# Altium PCB DIOT_Template.PcbDoc (part 4 of 4)
Units mm, origin at the board's own origin, x right, y up, seen from the top; angles counter-clockwise.
Board outline 222.9 x 100 mm, 4 copper layers (L1, P2, P3, L4), stack 1.546 mm thick; 233 components, 184 nets, 1067 pads, 325 vias.
Unrouted connection lines stored in the file: 423.
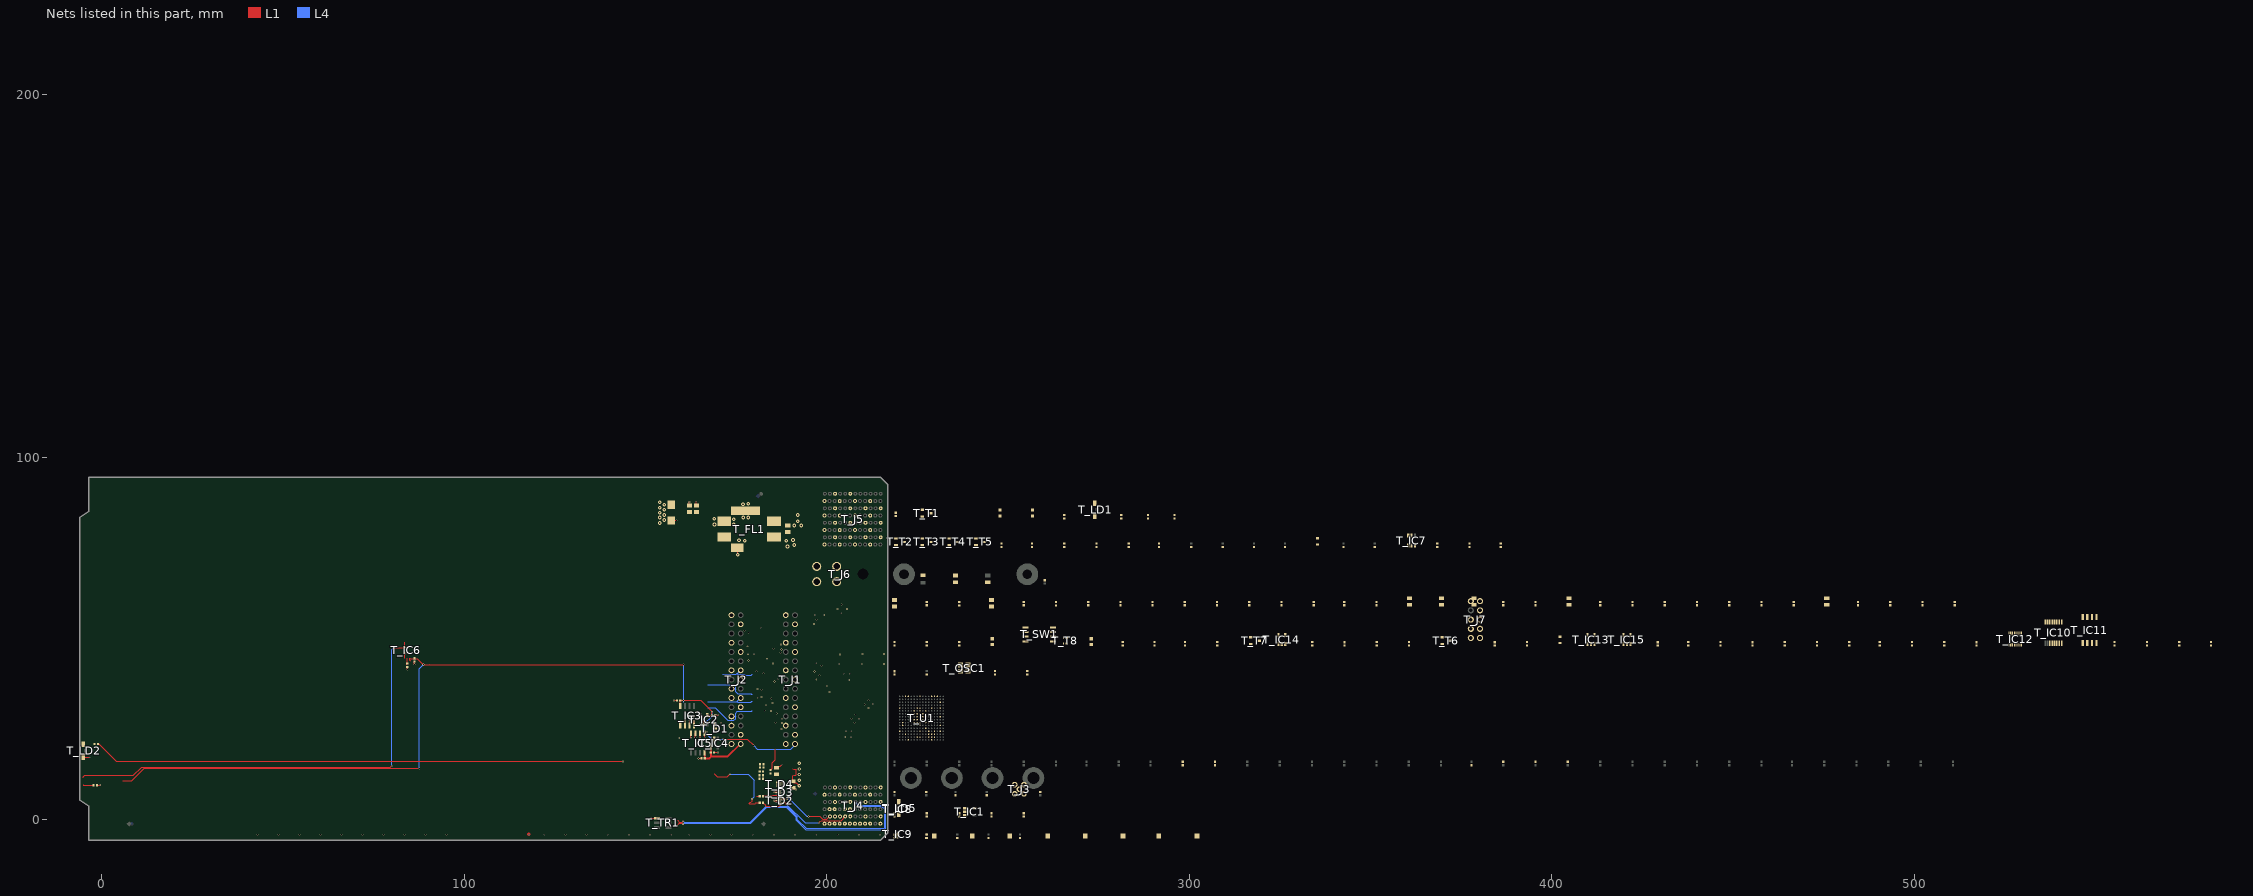
[diagram p5: the nets of this part, all layers, seen from the top]

## Via types
v1: diameter 0.5, hole 0.25, L1 to L4, tented both sides, 289 vias
v2: diameter 1, hole 0.45, L1 to L4, tented both sides, 28 vias
v3: diameter 0.9, hole 0.45, L1 to L4, tented both sides, 5 vias
v4: diameter 0.6, hole 0.3, L1 to L4, tented both sides, 3 vias

## Nets (pads, with @x,y where several pads share a name; then routed paths per layer and width w, separated by ;. In a path a pad name is that pad's centre, name@x,y a point inside that pad or via, vN(x,y) a via of type N, cw(c..) or ccw(c..) an arc to the next point about the centre after c; other vN are vias at no path point) (continued)
EEM_IO.LVDS_P12: T_J2.14 T_R47.2 | length 10.3
  L4 w0.14: 171.311,40.147 174.723,40.147 174.725,40.149 174.936,40.149 175.052,40.149 175.237,40.268 175.357,40.38 175.682,40.686 T_J2.14@175.704,40.707 ; T_J2.14@176.27,41.239 T_J2.14@175.704,40.707 ; 179.438,40.132 179.438,40.112 179.151,39.825 177.607,39.825 177.283,40.149 175.47,40.149 175.388,40.231 175.388,40.347 175.704,40.663 T_J2.14@175.704,40.707
EEM_IO.LVDS_P13: T_J2.17 T_R48.2 | length 15.3
  L4 w0.14: 167.2,37.248 174.576,37.248 174.85,36.974 174.85,36.276 174.715,36.14 174.866,35.989 174.866,35.334 175.442,34.758 179.147,34.758 179.234,34.671 179.438,34.671 ; T_J2.17@173.73,36.16 174.667,36.16
EEM_IO.LVDS_P14: T_J2.20 T_R49.2 | length 13.9
  L4 w0.14: 167.2,32.55 175.2,32.55 175.331,32.681 ; T_J2.20@176.27,33.62 175.331,32.681 ; 179.464,32.664 179.3,32.664 179.21,32.574 179.21,32.561 179.128,32.479 175.413,32.479 175.331,32.561 175.331,32.681
EEM_IO.LVDS_P15: T_J2.23 T_R50.1 | length 16.8
  L4 w0.14: 167.2,30.9 169.237,30.9 172.7,27.437 174.406,27.437 174.85,27.881 174.85,28.458 174.768,28.54 ; T_J2.23@173.73,28.54 174.768,28.54 ; 179.477,30.074 179.346,30.074 179.297,30.025 179.297,29.982 179.215,29.9 175.392,29.9 174.85,29.358 174.85,28.622 174.768,28.54
FLASH_SCK: T_IC11.6 T_IC12.9 T_J7.4 T_R76.1
FLASH_SDI: T_IC11.5 T_IC12.4 T_J7.2
FLASH_SDO: T_IC11.2 T_IC12.7 T_J7.3
FLASH_SS: T_IC12.12 T_IC15.2 T_J7.1 T_R77.1 T_R79.1
FLASH_SS_R: T_IC11.1 T_IC15.4 T_R79.2 T_R101.2
FPGA_CFG.FPGA_CDONE: T_J7.10 T_LD5.1 T_R70.1 T_TP9.1 T_U1.M10
FPGA_CFG.FPGA_CRESET_N: T_D7.2 T_IC14.4 T_R71.1 T_U1.N11
FPGA_CFG.FPGA_CSBSEL0: T_R90.1 T_SW1.8 T_U1.K11
FPGA_CFG.FPGA_CSBSEL1: T_R91.1 T_SW1.7 T_U1.P13
FPGA_CFG.FPGA_SCK: T_IC12.10 T_U1.R11
FPGA_CFG.FPGA_SDI: T_IC12.6 T_U1.P11
FPGA_CFG.FPGA_SDO: T_IC12.3 T_U1.P12
FPGA_CFG.FPGA_SS: T_IC12.13 T_U1.R12
GA0: T_R13.1 T_R31.1 T_T2.1
GA1: T_R14.1 T_R32.1 T_T3.1
GA2: T_R16.1 T_R33.1 T_T4.1
GA3: T_R18.1 T_R34.1 T_T5.1
GND: T_C1.1 T_C2.1 T_C3.1 T_C4.1 T_C5.1 T_C6.1 T_C8.1 T_C9.1 T_C10.1 T_C12.2 T_C13.2 T_C16.1 T_C20.1 T_C22.1 T_C23.1 T_C24.1 T_C25.1 T_C26.1 T_C27.1 T_C28.1 T_C29.1 T_C30.1 T_C31.1 T_C32.1 T_C33.1 T_C34.1 T_C35.1 T_C36.1 T_C37.1 T_C38.1 T_C39.1 T_C40.1 T_C41.1 T_C42.1 T_C43.1 T_C44.1 T_C45.1 T_C46.1 T_C47.1 T_C48.1 T_C49.1 T_C50.1 T_C51.1 T_C52.1 T_C53.1 T_C54.1 T_C59.1 T_C60.1 T_C61.1 T_C62.1 T_C63.1 T_C64.1 T_D1.2 T_D1.7 T_D2.2 T_D2.7 T_D3.2 T_D3.7 T_D4.2 T_D4.7 T_D5.2 T_FL1.4 T_IC1.2 T_IC2.2 T_IC3.1 T_IC3.2 T_IC3.3 T_IC3.4 T_IC4.2 T_IC5.1 T_IC5.2 T_IC5.3 T_IC5.4 T_IC6.2 T_IC7.2 T_IC8.4 T_IC9.4 T_IC10.13 T_IC11.4 T_IC12.8 T_IC13.3 T_IC14.3 T_IC15.3 T_J1.1 T_J1.4 T_J1.7 T_J1.10 T_J1.13 T_J1.16 T_J1.19 T_J1.22 T_J1.25 T_J2.1 T_J2.4 T_J2.7 T_J2.10 T_J2.13 T_J2.16 T_J2.19 T_J2.22 T_J2.25 T_J3.2 T_J4.A2 T_J4.A4 T_J4.A6 T_J4.C1 T_J4.C5 T_J4.D2 T_J4.D4 T_J4.D6 T_J4.F1 T_J4.F5 T_J4.G2 T_J4.G4 T_J4.G6 T_J4.I1 T_J4.I5 T_J4.J2 T_J4.J4 T_J4.J6 T_J4.L1 T_J4.L5 T_J5.A2 T_J5.A4 T_J5.A6 T_J5.C1 T_J5.C3 T_J5.C5 T_J5.C7 T_J5.D2 T_J5.D4 T_J5.D6 T_J5.F1 T_J5.F3 T_J5.F5 T_J5.F7 T_J5.G2 T_J5.G4 T_J5.G6 T_J5.G8 T_J5.I1 T_J5.I3 T_J5.I5 T_J5.I7 T_J5.J2 T_J5.J4 T_J5.J6 T_J5.J8 T_J5.L1 T_J5.L3 T_J5.L5 T_J5.L7 T_J7.5 T_LD3.1 T_LD4.1 T_OSC1.2 T_R7.1 T_R19.1 T_R25.1 T_R26.2 T_R27.2 T_R30.1 T_R69.1 T_R81.2 T_R83.2 T_R86.2 T_R94.1 T_R95.1 T_R99.1 T_SW1.1 T_SW1.2 T_SW1.3 T_SW1.4 T_T1.2 T_T2.2 T_T3.2 T_T4.2 T_T5.2 T_T6.2 T_TP5.1 T_TP6.1 T_TP7.1 T_TR1.6 T_U1.A4 T_U1.A12 T_U1.E15 T_U1.G7 T_U1.G8 T_U1.G9 T_U1.H7 T_U1.H8 T_U1.H9 T_U1.J7 T_U1.J8 T_U1.J9 T_U1.K2 T_U1.K7 T_U1.L15 T_U1.R7 T_U1.T4 T_U1.T12 | length 32.9
  L1 w0.25: v1(151.6,0.5) 151.63,0.47 T_TR1.6@153.21,0.47 ; v1(157.9,32.9) 157.937,32.937 T_C4.1@158.713,32.937 ; v1(159.6,27.3) 159.623,27.277 T_IC3.1@159.623,26.017 ; T_IC3.2@160.893,26.017 160.893,27.293 v1(160.9,27.3) ; T_IC3.3@162.163,26.017 162.163,27.322 v1(162.164,27.323) ; v1@162.529,22.637 T_IC5.4@162.529,23.875 ; v1(163.4,27.3) 163.433,27.267 T_IC3.4@163.433,26.017 ; v1(163.795,22.641) 163.799,22.645 T_IC5.3@163.799,23.875 ; v1(164.6,16.952) 164.616,16.968 T_C6.1@165.45,16.968 ; T_IC5.2@165.069,23.875 165.069,22.667 v1(165.089,22.647) ; T_IC2.2@166.1,26.3 v1(166.1,27.4) ; T_IC5.1@166.339,23.875 166.339,22.676 v1(166.367,22.649) ; T_C5.1@168.95,18.6 v1(170,18.6) ; v1(169,21.5) T_IC4.2@169,22.5 ; T_D1.7@169.1,25.2 T_D1.2@169.1,25.96 v1(169.1,26.9) ; T_C3.1@169.25,28.9 v1(170.1,28.9)
  L1 w0.3: 83.67,44.587 83.681,44.599 83.681,45.835 v1(83.693,45.847) ; v1(84.3,41.5) 84.313,41.513 84.313,42.168 T_R25.1@84.326,42.181 ; T_C8.1@86.28,43.67 T_C8.1@86.3,43.65 v1(86.3,42.9) ; T_D5.2@157.15,82.582 157.192,82.623 v1(158.623,82.623) ; v1(162.128,87.678) 162.128,86.794 T_C9.1@162.171,86.751 ; v1(164.008,87.729) 164.008,86.864 T_C10.1@164.121,86.751 ; T_FL1.4@175.338,75.06 175.489,74.909 v2(175.489,73.175) ; v1(185.49,5.324) 185.498,5.331 T_D2.2@186.24,5.331 T_D2.7@187,5.331 ; v1(185.595,7.663) 185.632,7.7 T_D3.2@186.5,7.7 ; 186.1,14.8 187.2,14.8 v1(187.6,15.2) ; T_D3.2@186.501,7.701 T_D3.7@186.937,7.701 ; T_C1.1@190.655,8.965 190.98,8.64 191.224,8.64 191.464,8.4 v1(191.5,8.4)
  other v1: 159.309,22.573 162.53,22.636 206.7,22.8 205.1,22.9 167,24.3 205.305,24.433 206.752,24.433 187.5,25.1 187.7,26.7 170.889,26.789 185.9,26.8 207.7,26.8 187.656,27.901 206.8,27.9 208.9,27.9 207.9,29 186.2,29.3 184.6,30 182.9,30.1 211.5,30.9 183.3,31.6 210.5,31.8 212.7,32 185.039,32.207 211.5,33 184.7,33.5 181,33.7 182,33.9 200.8,35.3 182,35.9 180.9,36.1 200,36.9 185.6,38.2 206.2,38.6 197.1,38.7 186.5,38.8 187.139,39.7 198,39.9 204.7,40.3 206.375,40.31 182.602,40.435 196.6,40.9 180.6,41 198.6,42.5 215.831,42.965 203.461,42.99 209.653,42.978 185.2,43.1 197.1,43.2 178.4,44 183.513,44.418 203.659,45.62 178.3,45.7 179.959,45.695 215.831,45.759 209.882,45.772 187.3,46.1 187.563,47.009 185.3,47.2 178.144,47.908 187.4,48.4 178.507,51.637 177.292,52.172 181.8,53 196.5,54 197.2,55.2 196.7,56.5 199.3,56.5 204,57 202.997,58.166 205.6,58.2 204.14,59.436
  other v2: 177.4,77 175.8,77.1 169.063,81.455 174.397,81.48 174.346,82.954 168.986,83.03 178.384,83.385 176.962,83.411 176.911,87.094 178.334,87.145
GNDPLL0: T_C55.1 T_C56.1 T_U1.N8
GNDPLL1: T_C57.1 T_C58.1 T_U1.E7
INT_I2C.SCL: T_IC9.3 T_R68.1
INT_I2C.SDA: T_IC9.2 T_R67.1
MUX_nEN: T_IC12.15 T_IC13.4 T_R78.1 T_R85.2
NetT_C2_2: T_C2.2 T_IC1.5 T_R2.1
NetT_C7_2: T_C7.2 T_J3.1
NetT_C11_1: T_C11.1 T_FL1.3 T_J6.1 T_J6.2
  other v2: 191.1,81.2 193,81.2 192,82.4 192,84.1
NetT_C11_2: T_C11.2 T_FL1.1 T_J6.3 T_J6.4
  other v2: 189.2,75.4 191.1,75.8 188.8,77 190.7,77.2
NetT_C13_1: T_C13.1 T_IC7.5 T_R29.2 T_R30.2
NetT_C14_1: T_C14.1 T_C21.2
NetT_C15_1: T_C15.1 T_T5.3
NetT_C17_1: T_C17.1 T_T2.3
NetT_C18_1: T_C18.1 T_C19.1 T_T3.3
NetT_C21_1: T_C21.1 T_T4.3
NetT_D2_4: T_D2.4 T_J4.H2 T_R15.2 | length 26.6
  L1 w0.125: T_R15.2@182.47,4.7 182.47,4.68 182.697,4.453 182.717,4.453 183.37,3.8 186.859,3.8 187.626,4.567 187.626,4.744 187.713,4.831 T_D2.4@187.76,4.831 188.469,4.831 188.861,4.439 v1(188.861,4.367) ; v1(197.858,-0.795) 197.896,-0.795 198.253,-0.438 198.253,-0.435 198.488,-0.2 203.95,-0.2 T_J4.H2@205.1,0.95
  L4 w0.125: v1(188.861,4.367) 194.023,-0.795 v1(197.858,-0.795)
NetT_D2_6: T_D2.6 T_J4.K2 T_R17.2 | length 21.7
  L1 w0.125: T_R17.2@182.47,6.535 182.531,6.596 185.032,6.596 185.188,6.752 186.107,6.752 186.539,6.32 187.209,6.32 187.507,6.021 187.507,5.919 187.595,5.831 T_D2.6@187.76,5.831 187.791,5.8 v1(189.1,5.8) ; v1(194.958,0.963) 198.037,0.963 198.87,0.13 200.081,0.13 T_J4.K2@200.9,0.95
  L4 w0.125: v1(189.1,5.8) 189.723,5.8 194.489,1.034 194.886,1.034 v1(194.958,0.963)
NetT_D6_2: T_D6.2 T_IC7.3
NetT_IC1_3: T_IC1.3 T_R4.2 T_R7.2
NetT_IC6_4: T_IC6.4 T_R25.2 | length 1.7
  L1 w0.125: T_R25.2@84.049,42.939 84.144,42.939 T_R25.2@84.326,43.121 ; T_R25.2@84.326,43.19 84.326,44.581
NetT_IC15_1: T_IC15.1 T_R98.2 T_R99.2
NetT_LD1_2: T_LD1.2 T_R1.1
NetT_LD2_1: T_LD2.1 T_T1.3 | length 1.8
  L1 w0.3: T_LD2.1@-5.1,17.3 v1(-3.251,17.3)
NetT_LD2_2: T_LD2.2 T_R3.2 | length 146.5
  L1 w0.3: -0.686,20.955 -0.686,20.905 -0.386,20.605 4.09,16.129 v1(143.815,16.129)
NetT_LD3_2: T_LD3.2 T_R5.1 | length 2.9
  L1 w0.125: -5.1,9.649 -5.001,9.55 T_R5.1@-2.223,9.55
NetT_LD4_2: T_LD4.2 T_R6.1
NetT_LD5_2: T_LD5.2 T_R100.1
NetT_OSC1_3: T_OSC1.3 T_R72.1
NetT_R85_1: T_R85.1 T_T6.3
NetT_R86_1: T_R86.1 T_R87.1 T_T6.1
NetT_R89_1: T_R89.1 T_T8.2
NetT_R89_2: T_R89.2 T_R95.2 T_T8.3 T_T8.5
NetT_R94_2: T_R94.2 T_T7.1 T_T8.6
P1V2: T_C32.2 T_C33.2 T_C34.2 T_C35.2 T_C36.2 T_C37.2 T_R73.1 T_R74.2 T_U1.A14 T_U1.F6 T_U1.F10 T_U1.K6 T_U1.K10 T_U1.L2
P2V5: T_C39.2 T_U1.E12
P3V3: T_C25.2 T_C26.2 T_C27.2 T_C28.2 T_C29.2 T_C30.2 T_C31.2 T_C38.2 T_IC9.1 T_IC9.5 T_OSC1.1 T_OSC1.4 T_R5.2 T_R67.2 T_R68.2 T_R69.2 T_R70.2 T_R71.2 T_R90.2 T_R91.2 T_R92.2 T_R93.2 T_R100.2 T_TP2.1 T_U1.K8 T_U1.N13 T_U1.P3 T_U1.R8 T_U1.R13 | length 0.9
  L1 w0.3: T_R5.2@-1.283,9.55 -1.257,9.576 -0.406,9.576 v1(-0.381,9.601)
P3V3_MP: T_C3.2 T_C4.2 T_C8.2 T_C20.2 T_C22.2 T_C23.2 T_C24.2 T_C61.2 T_C62.2 T_C63.2 T_IC2.4 T_IC3.8 T_IC6.5 T_IC7.6 T_IC8.1 T_IC8.8 T_IC9.8 T_IC10.12 T_IC10.15 T_IC13.5 T_IC14.5 T_J1.30 T_R1.2 T_R2.2 T_R6.2 T_R8.2 T_R31.2 T_R32.2 T_R33.2 T_R34.2 T_R75.2 T_R80.2 T_R82.2 T_R84.1 T_R87.2 T_T7.3 T_T8.4 T_TP3.1 | length 254.3
  L1 w0.2: 5.829,10.77 8.293,10.77 11.722,14.199 v1(87.63,14.199) ; 85.095,43.937 84.97,44.062 84.97,44.587 85.081,44.475 T_C8.2@86.3,44.475 ; T_C8.2@86.3,44.55 86.35,44.5 87.1,44.5 v1(88.776,42.824) 90.3,42.824 ; 90.3,42.9 90.376,42.824 v1(160.579,42.824) ; T_IC3.8@159.623,31.417 159.623,32.928 T_C4.2@159.613,32.937 165.263,32.937 v1(168.4,29.8) 168.35,29.75 T_C3.2@168.35,28.9 T_IC2.4@167.05,28.9 ; v1(171.5,22.3) 178.09,22.3 v1(179.867,20.523) ; 185.811,17.159 v1@185.811,19.489
  L1 w0.3: T_R2.2@184.5,13.77 184.52,13.77 184.66,13.91 184.66,13.93 184.96,14.23 184.96,15.76 185.811,16.611 185.811,17.159
  L4 w0.2: v1(87.63,14.199) 87.618,14.211 87.618,41.666 v1(88.776,42.824) ; v1(160.5,32.9) v1@160.554,32.954 ; 160.554,32.454 160.554,42.799 v1(160.579,42.824) ; v1(168.4,29.8) 168.4,28.64 166.4,26.64 166.4,24.1 167.7,22.8 168.2,22.3 170.9,22.3 v1(171.5,22.3) ; v1(179.867,20.523) 179.877,20.523 180.9,19.5 v1(185.8,19.5) 185.817,19.517 190.096,19.517 191.27,20.691 T_J1.30@191.27,20.92 T_J1.30@191.482,20.708
P3V3_MP2: T_C5.2 T_C6.2 T_IC4.4 T_IC5.8 T_J2.30 | length 15.1
  L1 w0.5: T_IC5.8@166.339,18.475 166.35,18.464 T_C6.2@166.35,16.968 167.661,16.968 168.093,17.4 168.05,17.443 T_IC4.4@168.05,19.9 ; 168.342,17.5 172.688,17.5 175.975,20.787 T_J2.30@175.975,20.949
P3V3_PROG: T_C59.2 T_C60.2 T_C64.2 T_IC11.3 T_IC11.7 T_IC11.8 T_IC12.16 T_IC15.5 T_J7.6 T_R76.2 T_R77.2 T_R78.2 T_R88.2 T_R101.1 T_T7.2 T_T8.1
P12V0: T_C1.2 T_C9.2 T_C10.2 T_D5.1 T_FL1.2 T_IC1.1 T_J1.28 T_J1.29 T_J2.28 T_J2.29 T_J4.A1 T_J4.D1 T_J4.E1 T_J4.G1 T_J4.H1 T_J4.J1 T_J4.K1 T_R3.1 T_R4.1 T_R29.1 T_TP1.1 | length 7.3
  L1 w0.3: 190.704,14.078 190.846,13.936 191.448,13.936 191.624,13.761 191.624,12.496 191.448,12.321 190.846,12.321 190.704,12.178 190.704,10.565 190.655,10.565 190.975,10.245 191.555,10.245 v3(192.4,9.4)
  other v2: 154,81.9 155.2,82.7 154,83.4 155.169,84.097 154,84.7 155.2,85.5 154,86.1 155.143,86.891 154,87.6
  other v3: 192.4,10.95 192.4,12.5 192.4,14.05 192.4,15.6
PE_CLK_N: T_R10.1 T_R12.2 | length 76.6
  L1 w0.14: 158.87,-0.1 158.87,-0.12 159.35,-0.6 160.138,-0.6 160.375,-0.363 v1(160.4,-0.363)
  L4 w0.14: v1(160.4,-0.363) 160.425,-0.363 160.662,-0.6 178.9,-0.6 183.3,3.8 189,3.8 191.9,0.9 191.9,0.064 194.327,-2.362 215.773,-2.362 215.956,-2.18 215.956,2.955 215.111,3.8 208.763,3.8 208.462,4.101 208.462,4.388 207.9,4.95
PE_CLK_P: T_R9.1 T_R11.2 | length 77.1
  L1 w0.14: 158.87,-1.4 158.87,-1.38 159.35,-0.9 160.138,-0.9 160.375,-1.138 v1(160.4,-1.138)
  L4 w0.14: v1(160.4,-1.138) 160.425,-1.138 160.662,-0.9 179.024,-0.9 183.424,3.5 188.876,3.5 191.6,0.776 191.6,-0.06 194.202,-2.662 215.897,-2.662 216.256,-2.304 216.256,3.079 215.235,4.1 208.888,4.1 208.762,4.225 208.762,4.412 209.3,4.95
PGOOD: T_IC13.1 T_IC14.2 T_T1.1 T_TP4.1
PROG_CRESET_N: T_IC14.1 T_J7.9 T_R88.1
PSU_EN: T_IC6.3 T_IC7.1 T_LD1.1 T_R8.1 T_TP8.1 | length 123.8
  L1 w0.125: -5.1,11.661 -5.1,11.838 -4.663,12.275 8.796,12.275 11.04,14.519 79.645,14.519 v1(80.01,14.884) ; v1(80.6,47.5) 80.63,47.47 81.7,47.47 83.355,47.47 83.67,47.784 83.67,48.987
  L4 w0.125: v1(80.01,14.884) 79.998,14.897 79.998,46.898 v1(80.6,47.5)
RSTn: T_D6.1 T_R15.1 | length 22.4
  L1 w0.125: 169.141,12.7 169.141,12.6 169.378,12.363 169.386,12.363 169.813,11.935 172.635,11.935 v1(173.3,12.6)
  L1 w0.127: v1(179.4,5.8) 179.4,5.2 179.083,4.883 178.912,4.883 178.65,4.62 178.65,4.45 178.667,4.467 180.259,4.467 180.492,4.7 T_R15.1@181.53,4.7
  L4 w0.125: v1(173.3,12.6) 178.399,12.6 180,10.999 180,6.4 v1(179.4,5.8)
SB_0: T_D4.4 T_J4.I2 T_R20.2
SB_1: T_D4.3 T_J4.G3 T_R21.2
SB_2: T_D4.1 T_J4.H3 T_R22.2
SB_3: T_D4.6 T_J4.J3 T_R23.2
SB_4: T_D4.5 T_J4.K3 T_R24.2
SC_A0: T_IC10.7 T_R81.1
SC_A1: T_IC10.6 T_R82.1
SC_A2: T_IC10.5 T_R83.1
SC_CRESET_N: T_D7.1 T_IC10.8
SC_MISO: T_IC10.14 T_IC12.5
SC_MOSI: T_IC10.10 T_IC12.2
SC_MUX_SEL: T_IC10.16 T_IC12.1 T_IC13.2 T_R75.1
SC_nINT: T_IC10.3 T_R84.2
SC_nRST: T_IC10.4 T_R80.1
SC_SCLK: T_IC10.11 T_IC12.11
SC_SS: T_IC10.9 T_IC12.14
SERVMOD_3V3: T_IC8.5 T_R17.1 T_R19.2 | length 0.8
  L1 w0.125: 180.735,6.535 T_R17.1@181.53,6.535
SHARED_BUS0: T_R20.1
SHARED_BUS1: T_R21.1
SHARED_BUS2: T_R22.1
SHARED_BUS3: T_R23.1
SHARED_BUS4: T_R24.1
SLAVESPI_MODE: T_J7.7 T_R98.1
STRIP2: T_R27.1
  other v1: 43,-4.1 48.789,-4.1 54.578,-4.1 60.367,-4.1 66.156,-4.1 71.944,-4.1 77.733,-4.1 83.522,-4.1 89.311,-4.1 95.1,-4.1
STRIP3: T_R28.1 | length 0.1
  L1 w0.9: v1@117.856,-4.013 v1@117.856,-3.937
  other v1: 117.856,-4.1 122.1,-4.1 127.933,-4.1 133.767,-4.1 139.6,-4.1 145.433,-4.1 151.267,-4.1 157.1,-4.1 162.1,-4.1 167.933,-4.1 173.767,-4.1 179.6,-4.1 185.433,-4.1 191.267,-4.1 197.1,-4.1 203.033,-4.1 208.867,-4.1 214.7,-4.1
SW0: T_R96.1
SW1: T_R97.1
USR_SW0: T_R92.1 T_R96.2 T_SW1.6
USR_SW1: T_R93.1 T_R97.2 T_SW1.5
VCCIO_0: T_C40.2 T_C44.2 T_C45.2 T_C46.2 T_C47.2 T_U1.A3 T_U1.A8 T_U1.A13 T_U1.F8
VCCIO_1: T_C41.2 T_C42.2 T_C48.2 T_C49.2 T_C50.2 T_U1.C15 T_U1.H10 T_U1.H15 T_U1.N15
VCCIO_3: T_C43.2 T_C51.2 T_C52.2 T_C53.2 T_C54.2 T_U1.E1 T_U1.G6 T_U1.J6 T_U1.N1
VCCPLL0: T_C55.2 T_C56.2 T_R73.2 T_U1.L8
VCCPLL1: T_C57.2 T_C58.2 T_R74.1 T_U1.E8
pads on no net: FTG1.FTG2 FTG2.1 FTG3.1 FTG4.1 FTG5.1 FTG6.1 T_D1.5 T_D2.5 T_D3.5 T_IC1.4 T_IC2.5 T_IC3.7 T_IC4.5 T_IC5.7 T_J4.B1 T_J4.L2 T_J5.A3 T_J5.A5 T_J5.A7 T_J5.A8 T_J5.B2 T_J5.B3 T_J5.B4 T_J5.B5 T_J5.B6 T_J5.B7 T_J5.B8 T_J5.C2 T_J5.C4 T_J5.C6 T_J5.C8 T_J5.D3 T_J5.D5 T_J5.D7 T_J5.D8 T_J5.E2 T_J5.E3 T_J5.E4 T_J5.E5 T_J5.E6 T_J5.E7 T_J5.E8 T_J5.F2 T_J5.F4 T_J5.F6 T_J5.F8 T_J5.G3 T_J5.G5 T_J5.G7 T_J5.H2 T_J5.H3 T_J5.H4 T_J5.H5 T_J5.H6 T_J5.H7 T_J5.H8 T_J5.I2 T_J5.I4 T_J5.I6 T_J5.I8 T_J5.J3 T_J5.J5 T_J5.J7 T_J5.K2 T_J5.K3 T_J5.K4 T_J5.K5 T_J5.K6 T_J5.K7 T_J5.K8 T_J5.L2 T_J5.L4 T_J5.L6 T_J5.L8 T_J6.5 T_J7.8 T_LD1.3 T_LD2.3 T_LD5.3 T_TR1.2 T_TR1.5 T_U1.A1 T_U1.A2 T_U1.A5 T_U1.A6 T_U1.A7 T_U1.A9 T_U1.A10 T_U1.A11 T_U1.A15 T_U1.A16 T_U1.B1 T_U1.B2 T_U1.B3 T_U1.B4 T_U1.B5 T_U1.B6 T_U1.B7 T_U1.B8 T_U1.B9 T_U1.B10 T_U1.B11 T_U1.B12 T_U1.B13 T_U1.B14 T_U1.B15 T_U1.B16 T_U1.C1 T_U1.C2 T_U1.C3 T_U1.C4 T_U1.C5 T_U1.C6 T_U1.C7 T_U1.C8 T_U1.C9 T_U1.C10 T_U1.C11 T_U1.C12 T_U1.C13 T_U1.C14 T_U1.C16 T_U1.D1 T_U1.D2 T_U1.D3 T_U1.D4 T_U1.D5 T_U1.D6 T_U1.D7 T_U1.D8 T_U1.D9 T_U1.D10 T_U1.D11 T_U1.D12 T_U1.D13 T_U1.D14 T_U1.D15 T_U1.D16 T_U1.E2 T_U1.E3 T_U1.E4 T_U1.E5 T_U1.E6 T_U1.E9 T_U1.E10 T_U1.E11 T_U1.E13 T_U1.E14 T_U1.E16 T_U1.F1 T_U1.F2 T_U1.F3 T_U1.F4 T_U1.F5 T_U1.F7 T_U1.F9 T_U1.F11 T_U1.F12 T_U1.F13 T_U1.F14 T_U1.F15 T_U1.F16 T_U1.G1 T_U1.G2 T_U1.G3 T_U1.G4 T_U1.G5 T_U1.G10 T_U1.G11 T_U1.G12 T_U1.G13 T_U1.G14 T_U1.G15 T_U1.G16 T_U1.H1 T_U1.H2 T_U1.H3 T_U1.H4 T_U1.H5 T_U1.H6 T_U1.H11 T_U1.H12 T_U1.H13 T_U1.H14 T_U1.H16 T_U1.J1 T_U1.J2 T_U1.J3 T_U1.J4 T_U1.J5 T_U1.J10 T_U1.J11 T_U1.J12 T_U1.J13 T_U1.J14 T_U1.J15 T_U1.J16 T_U1.K1 T_U1.K3 T_U1.K4 T_U1.K5 T_U1.K12 T_U1.K13 T_U1.K14 T_U1.K15 T_U1.K16 T_U1.L1 T_U1.L3 T_U1.L4 T_U1.L5 T_U1.L6 T_U1.L7 T_U1.L9 T_U1.L10 T_U1.L11 T_U1.L12 T_U1.L13 T_U1.L14 T_U1.L16 T_U1.M1 T_U1.M2 T_U1.M3 T_U1.M4 T_U1.M5 T_U1.M6 T_U1.M7 T_U1.M8 T_U1.M9 T_U1.M11 T_U1.M12 T_U1.M13 T_U1.M14 T_U1.M15 T_U1.M16 T_U1.N2 T_U1.N3 T_U1.N4 T_U1.N5 T_U1.N6 T_U1.N7 T_U1.N9 T_U1.N10 T_U1.N12 T_U1.N14 T_U1.N16 T_U1.P1 T_U1.P2 T_U1.P4 T_U1.P5 T_U1.P6 T_U1.P7 T_U1.P8 T_U1.P9 T_U1.P10 T_U1.P14 T_U1.P15 T_U1.P16 T_U1.R1 T_U1.R2 T_U1.R3 T_U1.R4 T_U1.R5 T_U1.R6 T_U1.R9 T_U1.R10 T_U1.R14 T_U1.R15 T_U1.R16 T_U1.T1 T_U1.T2 T_U1.T3 T_U1.T5 T_U1.T6 T_U1.T7 T_U1.T8 T_U1.T9 T_U1.T10 T_U1.T11 T_U1.T13 T_U1.T14 T_U1.T15 T_U1.T16
copper on no net: | length 872.3
  L1 w0.125: -5.1,6.149 -4.945,5.994 v1(-1.168,5.994) ; -5.1,15.161 3.355,15.161 v1(4.394,14.122) ; 4.826,10.77 v1(4.826,11.76) ; 81.7,46.53 88.27,46.53 89.862,44.937 89.862,44.887 90.25,44.5 90.3,44.5 ; 90.35,44.45 v1(161.189,44.45) ; 154.77,12.37 v1(156.865,12.37) 156.9,12.336 156.9,11.57 ; 159.3,6.3 161.9,8.9 166.197,8.9 167.084,9.786 167.084,11.406 167.332,11.654 175.454,11.654 176.25,12.45 176.25,12.65 ; 162.295,11 162.295,12.525 162.3,12.53 ; 169.139,14.203 170.438,14.203 170.441,14.2 171.896,14.2 171.899,14.203 ; v1(169.331,5.625) 169.34,5.633 169.34,7.649 ; v1(170,6.2) 170,7.6 ; v1(171.275,3.337) 171.275,1.864 171.29,1.849 ; 171.94,1.849 172.011,1.921 v1(172.011,2.946) ; v1(174.2,4.3) 174.2,5.3 174.4,5.1 176.087,5.1 176.587,5.6 178.499,5.6 180.434,7.535 181.53,7.535 ; 175.2,2 175.35,2.15 177.7,2.15 177.7,0.5 ; 175.3,10.35 175.95,10.35 176.73,11.13 177.5,11.13 ; v1(175.5,5.6) 175.955,6.055 176.505,6.055 176.912,6.462 177.3,6.85 177.3,6.9 177.344,6.856 179.151,6.856 180.83,8.535 181.53,8.535 ; 176.3,14.035 176.3,14.2 ; 176.305,12.65 176.305,14.035 ; 177.5,12.07 177.5,12.989 ; 178.432,12.996 178.436,13 v1(179.2,13) ; 179.723,8.823 180.429,9.529 181.517,9.529 ; v1(179.99,16.589) 180.73,15.849 182.072,15.849 182.719,16.497 182.719,18.626 183.253,19.16 183.253,19.846 183.454,20.047 v1(183.454,21.514) ; v1(180.7,7) v1@180.735,7.035 ; 181.442,25.785 181.442,24.658 181.6,24.5 182.112,24.5 ; 182.092,25.785 182.112,25.766 182.112,24.5 ; v1(182.188,21.517) 182.198,21.527 182.198,24.427 182.161,24.463 182.125,24.5 182.112,24.5 ; v1@183.454,21.515 183.818,21.515 184.042,21.29 184.042,19.985
  L1 w0.127: v1(178.8,7.4) 178.757,7.443 178.757,8.357 178.8,8.4 ; 178.8,8.45 179.173,8.823 179.723,8.823
  L1 w0.14: 166.6,-0.3 167.8,-0.3 168.1,0 168.35,0 168.35,0.3 168.48,0.43 168.64,0.43 169.195,0.985 169.195,1.645 169.35,1.8 169.35,2.95 169.5,3.1 169.846,3.1 170,2.946 170,1.8 ; 166.7,2.7 166.7,1.3 168.2,1.3 168.7,1.8 ; 168.3,-1.478 168.3,0.022 ; 169.7,-1.5 169.7,0 ; 169.703,0.003 171.15,0.003 ; 170.64,1.849 170.64,3.94 v1(170.7,4) ; 170.65,1.8 170.65,0.55 170.747,0.453 170.751,0.453 171.131,0.073 ; v1(171.867,5.144) 171.867,5.641 172.6,6.374 172.6,7.6
  L1 w0.15: 156.908,10.6 158.25,10.6 ; 160.55,9.65 163.35,9.65 163.565,9.865 163.565,11 ; 169.801,10.85 171.2,10.85 ; v1(170.1,9.4) 170.923,9.4 171.2,9.123 ; 171.2,9.35 171.2,9.123 ; 171.3,7.6 171.2,7.7 171.2,9.123 ; 171.3,9.015 171.315,9 171.747,9 171.95,8.797 171.95,7.6 ; 171.309,9.015 171.2,9.123 ; 172.75,0.003 172.753,0 v1(174,0) ; 172.8,9.35 172.8,10.85 ; v1(179.354,10.911) 179.375,10.891 179.375,9.925 179.4,9.9 179.4,9.95 179.775,10.325 179.825,10.325 179.939,10.439 181.485,10.439
  L1 w0.25: v1(160.509,4.078) 160.538,4.049 161.094,4.049 161.104,4.038 ; v1(160.546,10.706) 160.55,10.71 160.55,11.55 ; 162.087,3.907 162.087,4.917 162.295,5.125 162.295,5.6 ; v1(163.412,0.778) 163.423,0.789 163.423,1.87 ; 164.835,11 164.835,11.475 165.01,11.65 165.054,11.65 165.2,11.796 165.2,12.9 165.279,12.979 165.879,12.979 166.91,14.01 167.264,14.01 167.439,14.185 167.439,14.203 167.439,12.702 ; v1@167.348,6.452 167.348,6.97 167.329,6.99 167.514,7.175 167.595,7.175 168.194,7.775 168.194,10.843 ; 170.65,7.6 170.65,4.613 170.6,4.563 171.8,4.563 ; 172.6,1.8 173.85,1.8 173.9,1.75 ; 173.9,1.8 v4(173.899,2.557) v4(173.899,2.557) 173.9,2.558 173.9,3 174.471,3.571 175.171,3.571 175.2,3.6 ; 174.203,6.897 175.697,6.897 ; 175.7,6.9 175.7,6.95 176.025,7.275 176.118,7.275 176.868,8.025 176.875,8.025 177.2,8.35 177.2,8.4 ; 177.2,8.45 177.525,8.775 177.528,8.775 177.879,9.125 177.879,10.029 178.381,10.531 v4(178.381,11.181) ; 177.922,14.222 v4@178.8,14.222 ; 186.1,12.2 186.121,12.178 188.104,12.178
  L1 w0.3: -5.1,20.8 -4.945,20.955 -2.286,20.955 ; 4.749,10.63 4.889,10.77 ; 5.15,0 v1(6,0) ; 6.152,88.9 v1(7.303,88.9) ; v1(65.913,-2.591) 65.913,-1.763 66.015,-1.661 ; 66.015,0.239 66.04,0.264 v1(66.04,1.168) ; v1(82.372,48.997) 83.01,48.997 83.02,48.987 ; v1(82.4,44.6) 83.007,44.6 83.02,44.587 ; 162.3,13.47 163.084,13.47 163.3,13.254 163.3,13.2 163.6,12.9 163.9,13.2 v1(163.9,13.9) ; 164.835,5.6 164.762,5.673 164.762,6.638 164.5,6.9 163.8,6.9 163.565,6.665 163.565,3.813 163.423,3.67 163.752,3.341 164.48,3.341 164.771,3.05 164.8,3.05 165.1,2.75 165.1,2.371 165.1,-0.899 166.798,-2.598 172.502,-2.598 173.3,-1.8 176.75,-1.8 ; 166.105,5.6 166.1,5.605 166.1,6.6 166.49,6.99 167.329,6.99 ; 166.128,10.977 166.128,9.813 v1(166.148,9.793) ; v1(167.3,8.7) 167.329,8.671 167.329,7.89 ; v1@167.348,6.452 167.348,6.288 v1(167.383,6.253) ; v1(168.689,6.466) 168.691,6.469 168.691,7.647 168.69,7.649 ; 170.441,12.6 v1(171.4,12.6) ; 171.8,4.563 172.6,3.763 172.6,1.8 ; v1(173.499,13.349) 173.499,14.203 ; 173.9,0.85 174.592,0.85 174.632,0.89 v1(174.686,0.89) ; 174.2,6.9 v1(174.2,7.9) ; 174.378,12.791 174.378,13.778 v1(174.4,13.8) ; 175.8,0.5 v1(176.7,0.5) ; v1(176.1,8.4) 177.2,8.4 ; 176.75,4.45 177.596,4.45 177.646,4.4 v1(177.7,4.4) ; v1(179.872,25.832) 180.746,25.832 180.792,25.785 ; 180.259,2.867 181.267,2.867 v1(181.3,2.9) ; v1(183.356,17.923) 183.38,17.923 183.656,18.199 183.656,18.339 183.816,18.499 ; v1(184.496,12.024) 184.5,12.028 184.5,12.83 185.625,12.83 186.1,12.355 ; 184.692,19.985 184.73,19.948 184.73,18.499 ; 184.716,18.499 184.716,17.109 v1(184.734,17.09) ; v1(185.066,11.45) 185.625,11.45 186.1,11.925 186.1,12.178 186.1,12.475 186.575,12.95 186.599,12.95 186.851,13.202 v1(187.5,13.2) ; v1(189.404,13.128) 190.704,13.128
  L1 w0.5: 0,0 4.25,0 ; 0,88.9 4.152,88.9 ; v1(34.162,-1.829) 35.018,-1.829 35.051,-1.862 v1(35.051,-3.505)
  L1 w0.9: 36.947,-1.8 36.947,-1.575 36.997,-1.525 37.744,-1.525 v1(37.896,-1.373)
  L4 w0.125: v1(4.394,14.122) 4.826,13.691 v1(4.826,11.76) ; v1@156.91,12.5 156.919,12.49 156.99,12.49 161.528,17.028 161.528,44.111 v1(161.189,44.45) ; v1(169.331,5.625) 172.875,5.625 v1(174.2,4.3) ; v1(170,6.2) 171.709,6.2 174.909,9.4 177.843,9.4 v1(179.354,10.911) ; v1(171.275,3.337) 171.638,3.7 175.1,3.7 175.5,4.1 v1(175.5,5.6) ; v1@171.811,2.946 173.595,2.946 173.696,3.047 174.57,3.047 174.671,2.946 175.546,2.946 176.9,4.3 176.9,5.5 v1(178.8,7.4) ; v1(179.99,16.589) 179.99,13.79 v1(179.2,13) 179.7,12.5 179.7,11.69 180.653,10.737 v1@180.653,6.953 ; v1(182.188,21.517) 182.191,21.514 v1(183.454,21.514)
  L4 w0.14: v1(170.7,4) 170.797,4 170.933,4.135 170.935,4.135 171.867,5.067 v1(171.867,5.144)
  L4 w0.15: v1(170.1,9.4) 170.1,7.238 168.7,5.838 168.7,4.753 173.45,0.003 173.997,0.003 v1(174,0) ; v1(178.275,15.762) 179.603,17.09 182.4,17.09 182.737,16.753 184.398,16.753 v1(184.734,17.09)
  L4 w0.3: 65.913,-3.644 v1(65.913,-2.591)
  L4 w0.5: 0,0 -2.6,2.6 -2.6,5.78 -4.75,7.93 -4.75,82.05 -2.2,84.6 -2.2,85.689 0,87.889 ; 0,88.9 1.3,88.9 3.5,91.1 94.523,91.1 96.723,88.9 97.6,88.9 98.977,88.9 101.277,91.2 184.523,91.2 186.823,88.9 187.6,88.9 ; v1(34.162,-1.829) 34.744,-1.829 35.115,-2.2 ; v1(35.051,-3.505) 35.115,-3.441 35.115,-2.2 ; 187.6,0 185.102,-2.498 100.498,-2.498 98,0 97.6,0 97.111,0 94.911,-2.2 66.692,-2.2 66.256,-1.764 65.571,-1.764 65.134,-2.2 36.8,-2.2 35.115,-2.2
  other v1: -1.5,-4.1 4.333,-4.1 10.167,-4.1 16,-4.1 21.833,-4.1 27.667,-4.1 33.5,-4.1
  other v4: 178.8,14.2

## Polygon pours and split planes (outlines as drawn)
no net on L1 "NONET_L01_P252" (solid, pour order 252): 234.831,96.306 450.831,96.306 451.831,95.306 451.831,0.306 450.831,-0.694 449.831,0.306 241.831,0.306 241.831,5.306 233.831,5.306 233.831,8.306 231.831,8.306 231.831,85.306 234.831,88.306
no net on L1 "esd1" (solid, pour order 171): 3,1.7 ccw(c1,1.7) 1,3.7 -3.2,3.7 -3.2,-4.65 36.5,-4.65 36.5,-3.202 3,-3.202
P12V0 on L1 "L1-P12V0" (solid, remove dead copper, pour order 254): 174.444,79.956 174.828,79.572 174.828,77.028 173.159,75.359 168.656,75.359 168.605,75.41 165.79,75.41 160.151,81.049 154.051,81.049 153.2,81.9 153.2,87.9 154.096,88.796 165.049,88.796 166.319,87.526 166.319,81.912 168.339,79.893 168.402,79.956
STRIP2 on L1 "esd1" (solid, pour order 173): 96.932,-4.651 96.932,-3.156 41.932,-3.156 41.932,-4.651
STRIP3 on L1 "STRIP3_L01_P172" (solid, pour order 172): 214.885,-4.645 216.388,-3.142 116.932,-3.142 116.932,-4.645
GND on L1 "GND_L01_P245" (solid, pour order 245): 174.81,80.09 175.2,79.7 175.2,76.8 174.5,76.1 173.7,76.1 173.7,75 173.6,74.9 173.6,73.6 174.5,72.7 176.7,72.7 177.9,73.9 177.9,80.2 175.8,82.3 175.692,82.4 175.692,83.69 174.727,84.655 168.301,84.655 167.894,84.249 167.894,80.718 168.555,80.058 174.778,80.058
NetT_C11_2 on L1 "NETT_C11_2_L01_P244" (solid, pour order 244): 183.59,75.41 182.4,76.6 182.4,79.2 183.2,80.007 190.293,80.007 191.7,78.6 191.7,75.5 190.6,74.4 189.4,74.4 188.39,75.41
NetT_C11_1 on L1 "NETT_C11_1_L01_P243" (solid, pour order 243): 183.213,80.287 182.4,81.1 182.4,84.1 183.2,84.884 188.519,84.884 188.551,84.852 192.2,84.9 194.1,83 194.1,81.2 193.187,80.287
no net on L4 "NONET_L04_P253" (solid, pour order 253): 228.658,93.313 444.658,93.313 445.658,92.313 445.658,-2.687 444.658,-3.687 443.658,-2.687 235.658,-2.687 235.658,2.313 227.658,2.313 227.658,5.313 225.658,5.313 225.658,82.313 228.658,85.313
NetT_C11_1 on L4 "NETT_C11_1_L04_P248" (solid, pour order 248): 191.4,79.2 200.7,69.9 200.7,64.9 202,63.6 204,63.6 205.6,65.2 205.6,71.4 204.2,72.8 201.5,72.8 198.3,76 198.3,78.631 192.075,84.8 190.2,84.8 189.281,83.881 189.281,81.319
no net on L4 "esd1" (solid, pour order 147): 3,1.7 ccw(c1,1.7) 1,3.7 -3.2,3.7 -3.2,-4.65 36.5,-4.65 36.5,-3.135 3,-3.135
P12V0 on L4 "L4-P12V0" (solid, remove dead copper, pour order 250): 189.7,24.765 188.135,23.2 179.086,23.2 177.355,24.931 175.741,24.941 165.913,15.113 165.913,12.013 159.132,5.232 146.431,5.232 146.431,71.531 156.7,81.8 156.7,87.7 155.9,88.5 151.3,88.5 140.513,77.713 140.513,4.928 140.437,4.851 140.513,4.775 140.513,2.286 142.418,0.381 161.981,0.381 178.8,17.2 186.965,17.2 189.611,14.554 189.611,9.3 190.311,8.6 192.672,8.6 193.282,9.28 193.282,16.7 194.5,17.918 194.5,22.665 192.4,24.765
GND on L4 "GND_L04_P234" (solid, remove dead copper, pour order 234): 202.9,46.2 202.9,42.7 216.9,42.7 216.9,46.2
NetT_C11_2 on L4 "NETT_C11_2_L04_P247" (solid, pour order 247): 199.9,65.5 199.9,69.9 191.6,78.2 190.7,78.2 188.2,78.2 187.5,77.5 187.5,76.101 194.201,69.401 194.2,65.2 195.6,63.8 198.2,63.8
STRIP3 on L4 "STRIP3_L04_P175" (solid, pour order 175): 214.895,-4.635 216.379,-3.151 116.932,-3.151 116.932,-4.635
STRIP2 on L4 "esd1" (solid, pour order 176): 96.932,-4.651 96.932,-3.146 41.932,-3.146 41.932,-4.651
P3V3 on P3 (split plane): 151.534,21.539 151.544,21.49 151.572,21.448 157.63,15.39 157.63,-4.948 -2.898,-4.948 -2.898,3.8 -2.899,3.814 -2.899,3.827 -2.903,3.861 -2.906,3.894 -2.909,3.907 -2.91,3.921 -2.92,3.953 -2.928,3.986 -2.933,3.998 -2.937,4.012 -2.951,4.042 -2.964,4.073 -2.971,4.085 -2.977,4.097 -2.995,4.125 -3.013,4.154 -3.022,4.164 -3.029,4.175 -3.052,4.2 -3.074,4.226 -3.085,4.234 -3.094,4.244 -3.121,4.265 -3.146,4.287 -3.158,4.294 -3.168,4.302 -5.398,5.774 -5.398,83.126 -3.168,84.598 -3.158,84.606 -3.146,84.613 -3.121,84.635 -3.094,84.656 -3.085,84.666 -3.074,84.674 -3.052,84.7 -3.029,84.725 -3.022,84.736 -3.013,84.746 -2.995,84.775 -2.977,84.803 -2.971,84.815 -2.964,84.827 -2.951,84.858 -2.937,84.888 -2.933,84.902 -2.928,84.914 -2.92,84.947 -2.91,84.979 -2.909,84.993 -2.906,85.006 -2.903,85.039 -2.899,85.073 -2.899,85.086 -2.898,85.1 -2.898,93.848 151.534,93.848
no net on P3 (split plane): 187.749,13.343 187.749,10.376 182.1,10.376 182.071,10.371 182.046,10.354 180.246,8.554 180.229,8.529 180.224,8.5 180.224,7.032 173.968,0.776 168.982,0.776 165.176,4.582 165.176,8.2 165.171,8.229 165.162,8.242 165.154,8.254 161.776,11.632 161.776,14.568 164.1,16.892 184.2,16.892
GND on P3 (split plane): 216.298,92.201 216.298,1.065 194.745,1.065 194.552,1.258 194.552,15.3 194.544,15.365 194.518,15.426 194.478,15.478 192.978,16.978 192.926,17.018 192.865,17.044 192.8,17.052 191.6,17.052 191.535,17.044 191.474,17.018 191.444,16.996 191.422,16.978 190.522,16.078 190.482,16.026 190.456,15.965 190.448,15.9 190.448,8.2 190.448,-4.948 157.889,-4.948 157.889,15.443 157.879,15.493 157.851,15.535 151.793,21.593 151.793,93.848 214.651,93.848
P12V0 on P3 (split plane): 194.048,15.196 194.048,1.153 194.056,1.088 194.082,1.027 194.122,0.975 194.462,0.634 194.514,0.594 194.575,0.569 194.64,0.561 216.298,0.561 216.298,-3.301 214.651,-4.948 190.952,-4.948 190.952,8.2 190.952,15.796 191.704,16.548 192.696,16.548
NetT_C11_2 on P3 (split plane): 199.548,69.396 199.548,65.504 198.096,64.052 195.704,64.052 194.352,65.404 194.352,69.5 194.344,69.565 194.318,69.626 194.296,69.656 194.278,69.678 187.852,76.104 187.852,77.396 188.404,77.948 190.996,77.948
NetT_C11_1 on P3 (split plane): 197.948,78.696 197.948,76.1 197.956,76.035 197.982,75.974 198.022,75.922 201.322,72.622 201.374,72.582 201.435,72.556 201.5,72.548 204.096,72.548 205.348,71.296 205.348,65.404 203.696,63.752 202.504,63.752 201.052,65.204 201.052,69.7 201.044,69.765 201.018,69.826 200.996,69.856 200.978,69.878 189.552,81.304 189.552,83.596 190.504,84.548 192.096,84.548
GND on P2 (split plane): 216.298,92.201 216.298,-3.301 214.651,-4.948 119.658,-4.948 119.658,-3.48 119.649,-3.415 119.624,-3.354 119.584,-3.301 119,-2.717 118.947,-2.677 118.887,-2.652 118.821,-2.643 39.779,-2.643 39.47,-2.334 39.47,-1.321 39.461,-1.256 39.436,-1.195 39.396,-1.142 38.71,-0.457 38.658,-0.417 38.597,-0.391 38.532,-0.383 36.906,-0.383 36.841,-0.391 36.78,-0.417 36.728,-0.457 35.992,-1.193 35.951,-1.246 35.926,-1.306 35.918,-1.372 35.918,-4.948 -2.898,-4.948 -2.898,3.8 -2.899,3.814 -2.899,3.827 -2.903,3.861 -2.906,3.894 -2.909,3.907 -2.91,3.921 -2.92,3.953 -2.928,3.986 -2.933,3.998 -2.937,4.012 -2.951,4.042 -2.964,4.073 -2.971,4.085 -2.977,4.097 -2.995,4.125 -3.013,4.154 -3.022,4.164 -3.029,4.175 -3.052,4.2 -3.074,4.226 -3.085,4.234 -3.094,4.244 -3.121,4.265 -3.146,4.287 -3.158,4.294 -3.168,4.302 -5.398,5.774 -5.398,83.126 -3.168,84.598 -3.158,84.606 -3.146,84.613 -3.121,84.635 -3.094,84.656 -3.085,84.666 -3.074,84.674 -3.052,84.7 -3.029,84.725 -3.022,84.736 -3.013,84.746 -2.995,84.775 -2.977,84.803 -2.971,84.815 -2.964,84.827 -2.951,84.858 -2.937,84.888 -2.933,84.902 -2.928,84.914 -2.92,84.947 -2.91,84.979 -2.909,84.993 -2.906,85.006 -2.903,85.039 -2.899,85.073 -2.899,85.086 -2.898,85.1 -2.898,93.848 214.651,93.848
STRIP3 on P2 (split plane): 38.966,-1.425 38.966,-2.438 38.974,-2.504 38.999,-2.564 39.04,-2.617 39.497,-3.074 39.519,-3.091 39.549,-3.114 39.61,-3.139 39.675,-3.148 118.717,-3.148 119.153,-3.584 119.153,-4.948 36.422,-4.948 36.422,-1.476 37.011,-0.887 38.428,-0.887

## Keep-outs
L4:
  region: 6.7,85.4 -3.3,85.4 -3.3,92.4 6.7,92.4
  region: 6.7,-3.5 -3.3,-3.5 -3.3,3.5 6.7,3.5
Keep-Out Layer:
  drawing of 8328 lines, arcs and shapes, not listed

## Other copper
L1:
  rectangle net GND: 202.9,42.7 216.9,46.203
  rectangle net GND: 176.352,82.7 178.918,87.881
  text "CAUTION! The template PCB is not finalized. Controlled-impedance traces are  / not dimensioned correctly, and other design elements may also be incorrect." at 24,-45.904 h15
P2 (plane layer: these items are gaps in the copper):
  lines w0.5: 36.17,-5.41 36.17,-1.372 36.906,-0.635 38.532,-0.635 39.218,-1.321 39.218,-2.438 39.675,-2.896 118.821,-2.896 119.406,-3.48 119.406,-5.334
P3 (plane layer: these items are gaps in the copper):
  lines w0.15: 161.7,12.3 161.7,14.6 ; 161.7,14.6 164.068,16.968 184.232,16.968 187.825,13.375 187.825,10.3 182.1,10.3 180.3,8.5 180.3,7 174,0.7 168.95,0.7 165.1,4.55 165.1,8.2 161.7,11.6 161.7,14.6
  lines w0.254: 151.664,94.412 151.664,21.539 157.76,15.443 157.76,-5.486 171.323,-5.486
  lines w0.5: 190.7,-5.563 190.7,8.2 190.7,15.9 191.6,16.8 192.8,16.8 194.3,15.3 194.3,1.153 194.64,0.813 216.611,0.813 ; 187.6,76 194.1,69.5 194.1,65.3 195.6,63.8 198.2,63.8 199.8,65.4 199.8,69.5 191.1,78.2 188.3,78.2 187.6,77.5 187.6,76 ; 189.3,81.2 200.8,69.7 200.8,65.1 202.4,63.5 203.8,63.5 205.6,65.3 205.6,71.4 204.2,72.8 201.5,72.8 198.2,76.1 198.2,78.8 192.2,84.8 190.4,84.8 189.3,83.7 189.3,81.2

## Silkscreen, mask and mechanical layers (free items; w line width, h text height)
TopOverlay:
  lines w0.254: 157.606,-2.206 157.7,-2.3 159.2,-2.3 159.5,-2 ; 157.7,0.6 157.9,0.8 159.2,0.8 159.4,0.6
  text "GND" at 131.7,83.2 h1
  text "GND" at 5.4,71.4 h1
  text "WUT ISE 2024" at 112.649,64.186 h1.02
  text "EEM 0" at 187.8,62.3 h1
  text "EEM 1" at 173.145,62.173 h1
  text "DI/OT template v.P_version" at 107.29,58.826 h1.5
  text "P12V0" at -1.854,18.796 h1
  text "GND" at 132,18.6 h1
  text "OVT" at -2.159,13.284 h1
  text "P3V3" at 130.632,13.183 h1
  text "P12V0" at 130.556,11.506 h1
  text "PWR" at -2.26,7.493 h1
  text "DIOT" at 157.852,1.214 h1
BottomOverlay:
  lines w0.254: 178.6,28.8 178.9,28.5 180.9,28.5 181.3,28.9 ; 178.8,56.1 179.2,56.5 181,56.5 181.3,56.2 ; 193.8,28.7 194.1,28.4 195.8,28.4 196.2,28.8 ; 193.8,56.2 194.1,56.5 195.9,56.5 196.2,56.2
  text "WUT ISE 2024" at 125.04,63.293 h1.02
  text "DIOT" at 196.75,57.05 h1
  text "DIOT" at 181.681,56.865 h1
  text "DI/OT template v.P_version" at 134.048,55.916 h1.5
TopSolder:
  rectangle: -1.947,-4.947 0.23,-3.15
  rectangle: 0.23,-4.947 2.407,-3.175
  rectangle: 1.88,-4.947 216.849,-3.15
  region: 202.899,46.205 202.899,42.705 216.862,42.705 216.862,46.205
BottomSolder:
  rectangle: -1.947,-4.947 0.23,-3.15
  rectangle: 0.23,-4.947 2.407,-3.175
  rectangle: 1.799,-4.947 216.849,-3.15
  region: 202.899,46.205 202.899,42.705 216.862,42.705 216.862,46.205
Mechanical 1:
  the board outline again, w0.05
Mechanical 2:
  lines w0.1: -6.114,-19.788 -6.114,102.894
Mechanical 13:
  lines w0.01: -6.352,-6.334 -6.352,75.374
Drill Drawing:
  drawing of 307 lines, arcs and shapes, not listed
  text "Layer" at 53.073,140.279 h1.52
  text "Name" at 63.485,140.279 h1.52
  text "Material" at 85.577,140.279 h1.52
  text "Thickness" at 107.415,140.279 h1.52
  text "Constant" at 123.921,140.279 h1.52
  text "Gerber" at 138.396,140.279 h1.52
  text "Board Layer Stack" at 150.331,140.279 h1.52
  text "TopOverlay" at 63.485,137.231 h1.52
  text "GTO" at 138.396,137.231 h1.52
  text "TopSolder" at 63.485,134.183 h1.52
  text "Solder Resist" at 85.577,134.183 h1.52
  text "0,025mm" at 107.415,134.183 h1.52
  text "3.7" at 123.921,134.183 h1.52
  text "GTS" at 138.396,134.183 h1.52
  text "1" at 53.073,131.135 h1.52
  text "L1" at 63.485,131.135 h1.52
  text "0,035mm" at 107.415,131.135 h1.52
  text "GTL" at 138.396,131.135 h1.52
  text "Dielectric1" at 63.485,128.087 h1.52
  text "FR-4" at 85.577,128.087 h1.52
  text "0,120mm" at 107.415,128.087 h1.52
  text "4.25" at 123.921,128.087 h1.52
  text "2" at 53.073,125.039 h1.52
  text "P2" at 63.485,125.039 h1.52
  text "0,018mm" at 107.415,125.039 h1.52
  text "GP1" at 138.396,125.039 h1.52
  text "Dielectric3" at 63.485,121.991 h1.52
  text "FR-4" at 85.577,121.991 h1.52
  text "1,200mm" at 107.415,121.991 h1.52
  text "4.5" at 123.921,121.991 h1.52
  text "3" at 53.073,118.943 h1.52
  text "P3" at 63.485,118.943 h1.52
  text "0,018mm" at 107.415,118.943 h1.52
  text "GP2" at 138.396,118.943 h1.52
  text "Dielectric5" at 63.485,115.895 h1.52
  text "FR-4" at 85.577,115.895 h1.52
  text "0,120mm" at 107.415,115.895 h1.52
  text "4.25" at 123.921,115.895 h1.52
  text "4" at 53.073,112.847 h1.52
  text "L4" at 63.485,112.847 h1.52
  text "0,035mm" at 107.415,112.847 h1.52
  text "GBL" at 138.396,112.847 h1.52
  text "BottomSolder" at 63.485,109.799 h1.52
  text "Solder Resist" at 85.577,109.799 h1.52
  text "0,025mm" at 107.415,109.799 h1.52
  text "3.7" at 123.921,109.799 h1.52
  text "GBS" at 138.396,109.799 h1.52
  text "BottomOverlay" at 63.485,106.751 h1.52
  text "GBO" at 138.396,106.751 h1.52

## Text inside footprints (layer, text, board x,y; h text height)
T_J1: TopOverlay "30" at 192.667,21.555 h1.02 r270; Mechanical 14 "30" at 192.667,21.555 h1.02 r270
T_J2: TopOverlay "30" at 177.667,21.555 h1.02 r270; Mechanical 14 "30" at 177.667,21.555 h1.02 r270
T_J4: TopOverlay "A" at 215.3,-4.25 h1 r90; TopOverlay "B" at 213.9,-4.25 h1 r90; TopOverlay "C" at 212.5,-4.25 h1 r90; TopOverlay "D" at 211.1,-3.25 h1 r90; TopOverlay "E" at 209.7,-3.25 h1 r90; TopOverlay "F" at 208.3,-3.25 h1 r90; TopOverlay "G" at 206.9,-3.25 h1 r90; TopOverlay "H" at 205.5,-3.25 h1 r90; TopOverlay "I" at 204.1,-3 h1 r90; TopOverlay "J" at 202.7,-3.25 h1 r90; TopOverlay "K" at 201.3,-3.25 h1 r90; TopOverlay "L" at 199.9,-3.25 h1 r90; TopOverlay "1" at 194.85,-1.4 h1 r90; TopOverlay "2" at 194.85,0.6 h1 r90; TopOverlay "3" at 194.85,2.6 h1 r90; TopOverlay "4" at 194.85,4.6 h1 r90; TopOverlay "5" at 194.85,6.6 h1 r90; TopOverlay "6" at 194.85,8.6 h1 r90; Drill Drawing "PRESS-FIT TECHNOLOGY" at 215.55,11.45 h1 r180; Drill Drawing "Diam. 0.5mm +/-0.05" at 215.55,12.95 h1 r180; Mechanical 14 "A" at 215.3,-4.25 h1 r90; Mechanical 14 "B" at 213.9,-4.25 h1 r90; Mechanical 14 "C" at 212.5,-4.25 h1 r90; Mechanical 14 "D" at 211.1,-3.25 h1 r90; Mechanical 14 "E" at 209.7,-3.25 h1 r90; Mechanical 14 "F" at 208.3,-3.25 h1 r90; Mechanical 14 "G" at 206.9,-3.25 h1 r90; Mechanical 14 "H" at 205.5,-3.25 h1 r90; Mechanical 14 "I" at 204.1,-3 h1 r90; Mechanical 14 "J" at 202.7,-3.25 h1 r90; Mechanical 14 "K" at 201.3,-3.25 h1 r90; Mechanical 14 "L" at 199.9,-3.25 h1 r90; Mechanical 14 "1" at 194.85,-1.4 h1 r90; Mechanical 14 "2" at 194.85,0.6 h1 r90; Mechanical 14 "3" at 194.85,2.6 h1 r90; Mechanical 14 "4" at 194.85,4.6 h1 r90; Mechanical 14 "5" at 194.85,6.6 h1 r90; Mechanical 14 "6" at 194.85,8.6 h1 r90; Mechanical 8 "Top Surface of Mother Board" at 229.15,-0.425 h0.5 r90; Mechanical 8 "Edge of Daugher Card" at 217.65,0.725 h0.5 r90
T_J5: TopOverlay "A" at 215.3,72.75 h1 r90; TopOverlay "B" at 213.9,72.75 h1 r90; TopOverlay "C" at 212.5,72.75 h1 r90; TopOverlay "D" at 211.1,73.75 h1 r90; TopOverlay "E" at 209.7,73.75 h1 r90; TopOverlay "F" at 208.3,73.75 h1 r90; TopOverlay "G" at 206.9,73.75 h1 r90; TopOverlay "H" at 205.5,73.75 h1 r90; TopOverlay "I" at 204.1,74 h1 r90; TopOverlay "J" at 202.7,73.75 h1 r90; TopOverlay "K" at 201.3,73.75 h1 r90; TopOverlay "L" at 199.9,73.75 h1 r90; TopOverlay "1" at 194.85,75.6 h1 r90; TopOverlay "2" at 194.85,77.6 h1 r90; TopOverlay "3" at 194.85,79.6 h1 r90; TopOverlay "4" at 194.85,81.6 h1 r90; TopOverlay "5" at 194.85,83.6 h1 r90; TopOverlay "6" at 194.85,85.6 h1 r90; TopOverlay "8" at 194.85,89.6 h1 r90; TopOverlay "7" at 194.85,87.6 h1 r90; Drill Drawing "PRESS-FIT TECHNOLOGY" at 215.55,92.45 h1 r180; Drill Drawing "Diam. 0.5mm +/-0.05" at 215.55,93.95 h1 r180; Mechanical 14 "A" at 215.3,72.75 h1 r90; Mechanical 14 "B" at 213.9,72.75 h1 r90; Mechanical 14 "C" at 212.5,72.75 h1 r90; Mechanical 14 "D" at 211.1,73.75 h1 r90; Mechanical 14 "E" at 209.7,73.75 h1 r90; Mechanical 14 "F" at 208.3,73.75 h1 r90; Mechanical 14 "G" at 206.9,73.75 h1 r90; Mechanical 14 "H" at 205.5,73.75 h1 r90; Mechanical 14 "I" at 204.1,74 h1 r90; Mechanical 14 "J" at 202.7,73.75 h1 r90; Mechanical 14 "K" at 201.3,73.75 h1 r90; Mechanical 14 "L" at 199.9,73.75 h1 r90; Mechanical 14 "1" at 194.85,75.6 h1 r90; Mechanical 14 "2" at 194.85,77.6 h1 r90; Mechanical 14 "3" at 194.85,79.6 h1 r90; Mechanical 14 "4" at 194.85,81.6 h1 r90; Mechanical 14 "5" at 194.85,83.6 h1 r90; Mechanical 14 "6" at 194.85,85.6 h1 r90; Mechanical 14 "8" at 194.85,89.6 h1 r90; Mechanical 14 "7" at 194.85,87.6 h1 r90; Mechanical 8 "Top Surface of Mother Board" at 229.15,78.575 h0.5 r90; Mechanical 8 "Edge of Daugher Card" at 217.65,79.725 h0.5 r90
T_J6: TopOverlay "1" at 201.8,72.284 h1.2 r270; Mechanical 14 "1" at 201.8,72.284 h1.2 r270
T_J7: TopOverlay "1" at 380.747,47.868 h1.2 r90
T_LD1: Mechanical 8 "K" at 273.679,87.033 h0.5 r270
T_LD2: Mechanical 8 "K" at -5.35,20.533 h0.5 r270
T_LD5: Mechanical 8 "K" at 219.579,4.733 h0.5 r270
T_SW1: TopOverlay "4" at 256.343,49.499 h1 r270; TopOverlay "3" at 256.343,50.769 h1 r270; TopOverlay "ON" at 259.899,53.69 h1 r270; TopOverlay "2" at 256.343,52.039 h1 r270; TopOverlay "1" at 256.343,53.309 h1 r270; Mechanical 14 "4" at 256.353,49.499 h1 r270; Mechanical 14 "3" at 256.353,50.769 h1 r270; Mechanical 14 "ON" at 259.909,53.69 h1 r270; Mechanical 14 "2" at 256.353,52.039 h1 r270; Mechanical 14 "1" at 256.353,53.309 h1 r270